# EAGLE board SOIC_TSSOP-16 proto (EAGLE 7.3.0)
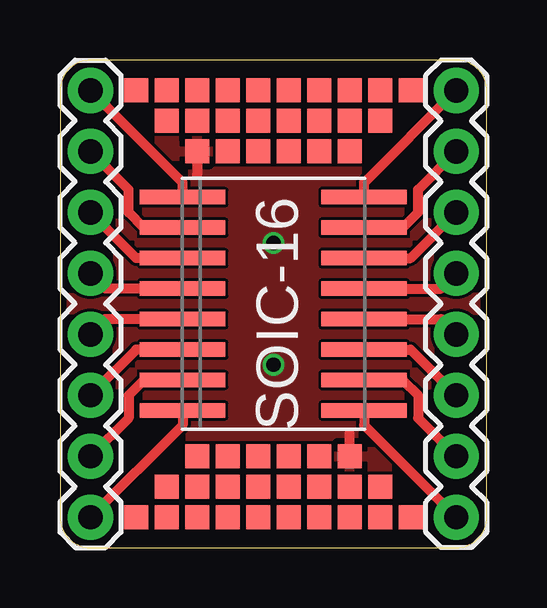
[diagram p0: board, top side]
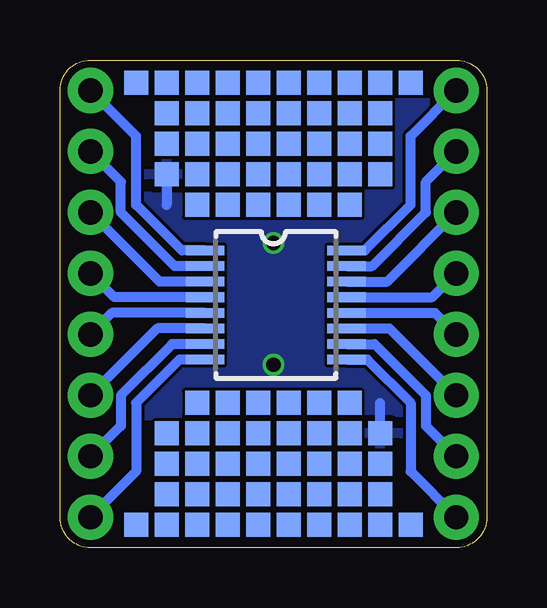
[diagram p1: board, bottom side, seen from below]

Size 17.78 x 20.32 mm. Coordinates in mm from the lower left corner, seen from the top.
Outline: 16.51,20.32 1.27,20.32 arc90 0,19.05 0,1.27 arc90 1.27,0 16.51,0 arc90 17.78,1.27 17.78,19.05 arc90 16.51,20.32
Copper layers (1*16): Top 0.035mm / dielectric 1.5mm / Bottom 0.035mm
Design rules "dirt_cheap_dirty_boards.v1": minimum track width 5mil, minimum drill 12mil, track to track 5mil, track to pad 5mil, pad to pad 5mil, via to via 5mil, smd to smd 0mil, copper to edge 10mil, drill to drill 10mil, minimum pad ring 10mil, minimum via ring 6mil, stop-mask expansion 2mil, vias tented up to drill 25mil, thermal gap 10mil

## Footprints (pad centres in the part's own frame; a part is rotated, then mirrored left to right if it is on the bottom)
TP10SQ = smd 1 x 1: TP 0,0
1X08_ROUND = drill 1.016 pad 1.88: 1 0,0; 2 2.54,0; 3 5.08,0; 4 7.62,0; 5 10.16,0; 6 12.7,0; 7 15.24,0; 8 17.78,0
SOIC-16NW = smd 0.6 x 3.56: P1 -4.445,-3.78; P2 -3.175,-3.78; P3 -1.905,-3.78; P4 -0.635,-3.78; P5 0.635,-3.78; P6 1.905,-3.78; P7 3.175,-3.78; P8 4.445,-3.78; P9 4.445,3.78; P10 3.175,3.78; P11 1.905,3.78; P12 0.635,3.78; P13 -0.635,3.78; P14 -1.905,3.78; P15 -3.175,3.78; P16 -4.445,3.78
TSSOP16 = smd 0.4 x 1.6: 1 -2.225,-2.85; 2 -1.575,-2.85; 3 -0.925,-2.85; 4 -0.275,-2.85; 5 0.375,-2.85; 6 1.025,-2.85; 7 1.675,-2.85; 8 2.325,-2.85; 9 2.325,3.05; 10 1.675,3.05; 11 1.025,3.05; 12 0.375,3.05; 13 -0.275,3.05; 14 -0.925,3.05; 15 -1.575,3.05; 16 -2.225,3.05

## Placement (x,y rotation side)
E$1  [TP10SQ]  3.17,1.27 0 top
E$2  [TP10SQ]  4.45,1.27 0 top
E$3  [TP10SQ]  5.71,1.27 0 top
E$4  [TP10SQ]  6.99,1.27 0 top
E$5  [TP10SQ]  8.26,1.27 0 top
E$6  [TP10SQ]  9.53,1.27 0 top
E$7  [TP10SQ]  10.79,1.27 0 top
E$8  [TP10SQ]  12.06,1.27 0 top
E$9  [TP10SQ]  10.79,2.54 0 top
E$10  [TP10SQ]  9.53,2.54 0 top
E$11  [TP10SQ]  8.26,2.54 0 top
E$12  [TP10SQ]  6.99,2.54 0 top
E$13  [TP10SQ]  5.71,2.54 0 top
E$14  [TP10SQ]  4.45,2.54 0 top
E$15  [TP10SQ]  5.71,3.81 0 top
E$16  [TP10SQ]  6.99,3.81 0 top
E$17  [TP10SQ]  8.26,3.81 0 top
E$18  [TP10SQ]  9.53,3.81 0 top
E$19  [TP10SQ]  10.79,3.81 0 top
E$20  [TP10SQ]  12.06,3.81 0 top
E$21  [TP10SQ]  12.06,2.54 0 top
E$22  [TP10SQ]  13.34,2.54 0 top
E$23  [TP10SQ]  13.34,1.27 0 top
E$24  [TP10SQ]  14.61,1.27 0 top
E$25  [TP10SQ]  12.06,16.51 0 top
E$26  [TP10SQ]  10.79,16.51 0 top
E$27  [TP10SQ]  9.53,16.51 0 top
E$28  [TP10SQ]  8.26,16.51 0 top
E$29  [TP10SQ]  6.99,16.51 0 top
E$30  [TP10SQ]  5.71,16.51 0 top
E$31  [TP10SQ]  5.71,17.78 0 top
E$32  [TP10SQ]  4.45,17.78 0 top
E$33  [TP10SQ]  4.45,19.05 0 top
E$34  [TP10SQ]  3.17,19.05 0 top
E$35  [TP10SQ]  5.71,19.05 0 top
E$36  [TP10SQ]  6.99,17.78 0 top
E$37  [TP10SQ]  8.26,17.78 0 top
E$38  [TP10SQ]  9.53,17.78 0 top
E$39  [TP10SQ]  10.79,17.78 0 top
E$40  [TP10SQ]  12.06,17.78 0 top
E$41  [TP10SQ]  13.34,17.78 0 top
E$42  [TP10SQ]  6.99,19.05 0 top
E$43  [TP10SQ]  8.26,19.05 0 top
E$44  [TP10SQ]  9.53,19.05 0 top
E$45  [TP10SQ]  10.79,19.05 0 top
E$46  [TP10SQ]  12.06,19.05 0 top
E$47  [TP10SQ]  13.34,19.05 0 top
E$48  [TP10SQ]  14.61,19.05 0 top
E$49  [TP10SQ]  3.17,19.37 0 bottom
E$50  [TP10SQ]  4.45,19.37 0 bottom
E$51  [TP10SQ]  4.45,18.1 0 bottom
E$52  [TP10SQ]  4.45,16.83 0 bottom
E$53  [TP10SQ]  4.45,15.56 0 bottom
E$54  [TP10SQ]  5.71,14.29 0 bottom
E$55  [TP10SQ]  5.71,15.56 0 bottom
E$56  [TP10SQ]  5.71,16.83 0 bottom
E$57  [TP10SQ]  5.71,18.1 0 bottom
E$58  [TP10SQ]  5.71,19.37 0 bottom
E$59  [TP10SQ]  6.99,19.37 0 bottom
E$60  [TP10SQ]  6.99,18.1 0 bottom
E$61  [TP10SQ]  6.99,16.83 0 bottom
E$62  [TP10SQ]  6.99,15.56 0 bottom
E$63  [TP10SQ]  6.99,14.29 0 bottom
E$64  [TP10SQ]  8.26,14.29 0 bottom
E$65  [TP10SQ]  8.26,15.56 0 bottom
E$66  [TP10SQ]  8.26,16.83 0 bottom
E$67  [TP10SQ]  8.26,18.1 0 bottom
E$68  [TP10SQ]  8.26,19.37 0 bottom
E$69  [TP10SQ]  9.53,19.37 0 bottom
E$70  [TP10SQ]  9.53,18.1 0 bottom
E$71  [TP10SQ]  9.53,16.83 0 bottom
E$72  [TP10SQ]  9.53,15.56 0 bottom
E$73  [TP10SQ]  9.53,14.29 0 bottom
E$74  [TP10SQ]  10.79,14.29 0 bottom
E$75  [TP10SQ]  10.79,15.56 0 bottom
E$76  [TP10SQ]  10.79,16.83 0 bottom
E$77  [TP10SQ]  10.79,18.1 0 bottom
E$78  [TP10SQ]  10.79,19.37 0 bottom
E$79  [TP10SQ]  12.06,19.37 0 bottom
E$80  [TP10SQ]  12.06,18.1 0 bottom
E$81  [TP10SQ]  12.06,16.83 0 bottom
E$82  [TP10SQ]  12.06,15.56 0 bottom
E$83  [TP10SQ]  12.06,14.29 0 bottom
E$84  [TP10SQ]  13.34,15.56 0 bottom
E$85  [TP10SQ]  13.34,16.83 0 bottom
E$86  [TP10SQ]  13.34,18.1 0 bottom
E$87  [TP10SQ]  13.34,19.37 0 bottom
E$88  [TP10SQ]  14.61,19.37 0 bottom
E$89  [TP10SQ]  13.34,0.95 180 bottom
E$90  [TP10SQ]  13.34,2.22 180 bottom
E$91  [TP10SQ]  13.34,3.49 180 bottom
E$92  [TP10SQ]  13.34,4.76 180 bottom
E$93  [TP10SQ]  12.06,6.03 180 bottom
E$94  [TP10SQ]  12.06,4.76 180 bottom
E$95  [TP10SQ]  12.06,3.49 180 bottom
E$96  [TP10SQ]  12.06,2.22 180 bottom
E$97  [TP10SQ]  12.06,0.95 180 bottom
E$98  [TP10SQ]  10.79,0.95 180 bottom
E$99  [TP10SQ]  10.79,2.22 180 bottom
E$100  [TP10SQ]  10.79,3.49 180 bottom
E$101  [TP10SQ]  10.79,4.76 180 bottom
E$102  [TP10SQ]  10.79,6.03 180 bottom
E$103  [TP10SQ]  9.53,6.03 180 bottom
E$104  [TP10SQ]  9.53,4.76 180 bottom
E$105  [TP10SQ]  9.53,3.49 180 bottom
E$106  [TP10SQ]  9.53,2.22 180 bottom
E$107  [TP10SQ]  9.53,0.95 180 bottom
E$108  [TP10SQ]  8.26,0.95 180 bottom
E$109  [TP10SQ]  8.26,2.22 180 bottom
E$110  [TP10SQ]  8.26,3.49 180 bottom
E$111  [TP10SQ]  8.26,4.76 180 bottom
E$112  [TP10SQ]  8.26,6.03 180 bottom
E$113  [TP10SQ]  6.99,6.03 180 bottom
E$114  [TP10SQ]  6.99,4.76 180 bottom
E$115  [TP10SQ]  6.99,3.49 180 bottom
E$116  [TP10SQ]  6.99,2.22 180 bottom
E$117  [TP10SQ]  6.99,0.95 180 bottom
E$118  [TP10SQ]  5.71,0.95 180 bottom
E$119  [TP10SQ]  5.71,2.22 180 bottom
E$120  [TP10SQ]  5.71,3.49 180 bottom
E$121  [TP10SQ]  5.71,4.76 180 bottom
E$122  [TP10SQ]  5.71,6.03 180 bottom
E$124  [TP10SQ]  4.45,3.49 180 bottom
E$125  [TP10SQ]  4.45,2.22 180 bottom
E$126  [TP10SQ]  4.45,0.95 180 bottom
E$127  [TP10SQ]  14.61,0.95 180 bottom
E$128  [TP10SQ]  3.17,0.95 180 bottom
GND  [TP10SQ]  4.45,4.76 180 bottom
JP1  [1X08_ROUND]  1.27,1.27 90 top
JP2  [1X08_ROUND]  16.51,19.05 270 top
SOIC-16  SOIC-16  [SOIC-16NW]  8.89,10.16 270 top
U$2  TSSOP-16  [TSSOP16]  8.89,10.16 270 bottom

## Library data of the parts
E$1-E$122 E$124-E$128 GND = testpad
JP1 JP2 = SparkFun-Connectors
SOIC-16 = dp_devices
U$2 = Kevin-GenericICFootprints

## Nets
1: JP1.8 SOIC-16.P1 U$2.16
2: JP1.7 SOIC-16.P2 U$2.15
3: JP1.6 SOIC-16.P3 U$2.14
4: JP1.5 SOIC-16.P4 U$2.13
5: JP1.4 SOIC-16.P5 U$2.12
6: JP1.3 SOIC-16.P6 U$2.11
7: JP1.2 SOIC-16.P7 U$2.10
8: JP1.1 SOIC-16.P8 U$2.9
9: JP2.8 SOIC-16.P9 U$2.8
10: JP2.7 SOIC-16.P10 U$2.7
11: JP2.6 SOIC-16.P11 U$2.6
12: JP2.5 SOIC-16.P12 U$2.5
13: JP2.4 SOIC-16.P13 U$2.4
14: JP2.3 SOIC-16.P14 U$2.3
15: JP2.2 SOIC-16.P15 U$2.2
16: JP2.1 SOIC-16.P16 U$2.1
GND: E$20.TP E$30.TP E$84.TP GND.TP

## Tracks (layer width: path | path; a pad name or v marks a point on that pad's centre or on a via)
1
  Top 0.406: SOIC-16.P1 5.11,15.21 JP1.8
  Bottom 0.406: U$2.16 5.08,12.38 3.17,14.29 3.17,17.14 JP1.8
2
  Top 0.406: SOIC-16.P2 3.49,13.34 2.86,13.97 2.86,14.92 JP1.7
  Bottom 0.406: U$2.15 4.78,11.73 2.54,13.97 2.54,15.24 JP1.7
3
  Top 0.406: SOIC-16.P3 3.17,12.06 JP1.6
  Bottom 0.406: U$2.14 4.16,11.09 JP1.6
4
  Top 0.406: SOIC-16.P4 1.91,10.79 JP1.5
  Bottom 0.406: U$2.13 2.27,10.44 JP1.5
5
  Top 0.406: SOIC-16.P5 1.91,9.53 JP1.4
  Bottom 0.406: U$2.12 2.17,9.79 JP1.4
6
  Top 0.406: SOIC-16.P6 3.17,8.26 JP1.3
  Bottom 0.406: U$2.11 4.05,9.13 JP1.3
7
  Top 0.406: SOIC-16.P7 3.49,6.99 2.86,6.35 2.86,5.4 JP1.2
  Bottom 0.406: U$2.10 4.67,8.48 2.54,6.35 2.54,5.08 JP1.2
8
  Top 0.406: SOIC-16.P8 5.11,5.11 JP1.1
  Bottom 0.406: U$2.9 4.98,7.83 3.17,6.03 3.17,3.17 JP1.1
9
  Top 0.406: SOIC-16.P9 12.67,5.11 JP2.8
  Bottom 0.406: U$2.8 12.8,7.83 14.61,6.03 14.61,3.17 JP2.8
10
  Top 0.406: SOIC-16.P10 14.29,6.99 14.92,6.35 14.92,5.4 JP2.7
  Bottom 0.406: U$2.7 13.11,8.48 15.24,6.35 15.24,5.08 JP2.7
11
  Top 0.406: SOIC-16.P11 14.61,8.26 JP2.6
  Bottom 0.406: U$2.6 13.72,9.13 JP2.6
12
  Top 0.406: SOIC-16.P12 15.88,9.53 JP2.5
  Bottom 0.406: U$2.5 15.62,9.79 JP2.5
13
  Top 0.406: SOIC-16.P13 15.88,10.79 JP2.4
  Bottom 0.406: U$2.4 15.52,10.44 JP2.4
14
  Top 0.406: SOIC-16.P14 14.61,12.06 JP2.3
  Bottom 0.406: U$2.3 13.62,11.09 JP2.3
15
  Top 0.406: SOIC-16.P15 14.29,13.34 14.92,13.97 14.92,14.92 JP2.2
  Bottom 0.406: U$2.2 13.01,11.73 15.24,13.97 15.24,15.24 JP2.2
16
  Top 0.406: SOIC-16.P16 12.67,15.21 JP2.1
  Bottom 0.406: U$2.1 12.7,12.38 14.61,14.29 14.61,17.14 JP2.1
GND  (via drill 0.6)
  Top 0.406: E$30.TP 5.71,15.56 | E$20.TP 12.06,4.76
  Bottom 0.406: GND.TP 4.45,6.03 | E$84.TP 13.34,14.29
  other vias: 8.89,12.7 8.89,7.62
  pour Top: 0,20.32 17.78,20.32 17.78,0 0,0
  pour Bottom: 0,20.32 17.78,20.32 17.78,0 0,0